# Altium PCB PCB1.PcbDoc
Units mil, origin at the board's own origin, x right, y up, seen from the top; angles counter-clockwise.
Board outline 3864.82 x 2365.71 mil, 2 copper layers (Top Layer, Bottom Layer); 47 components, 43 nets, 149 pads, 18 vias.
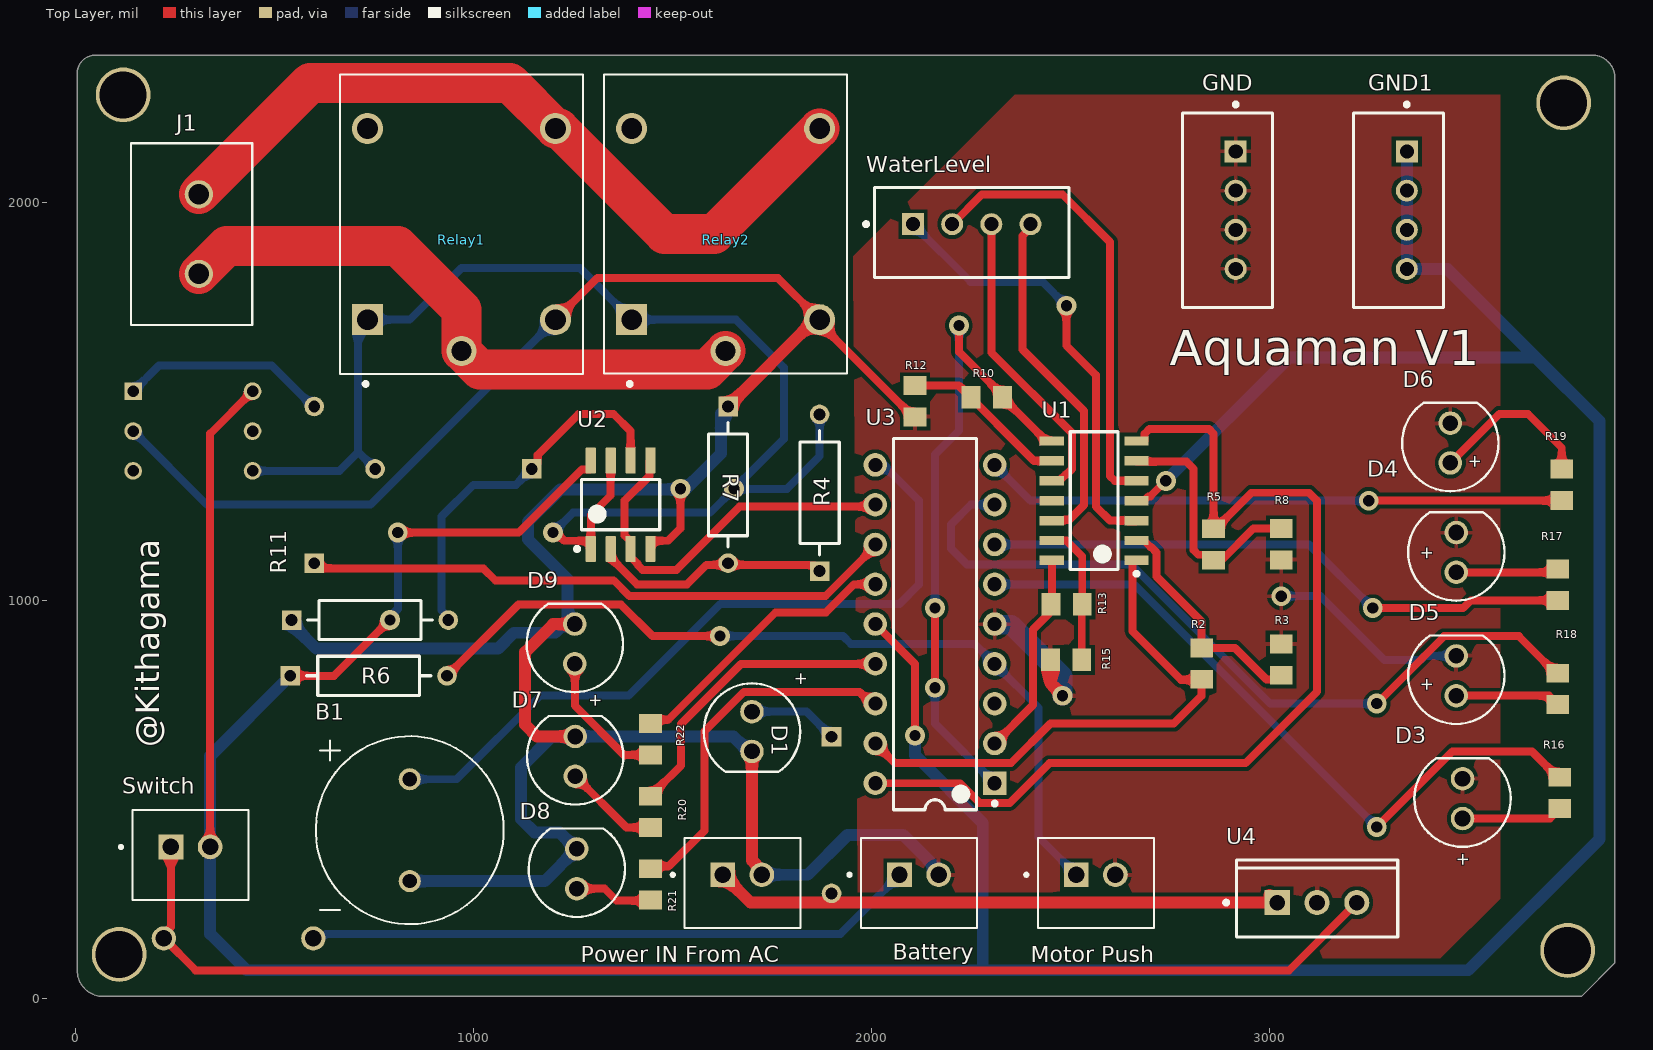
[diagram p0: Top Layer view]
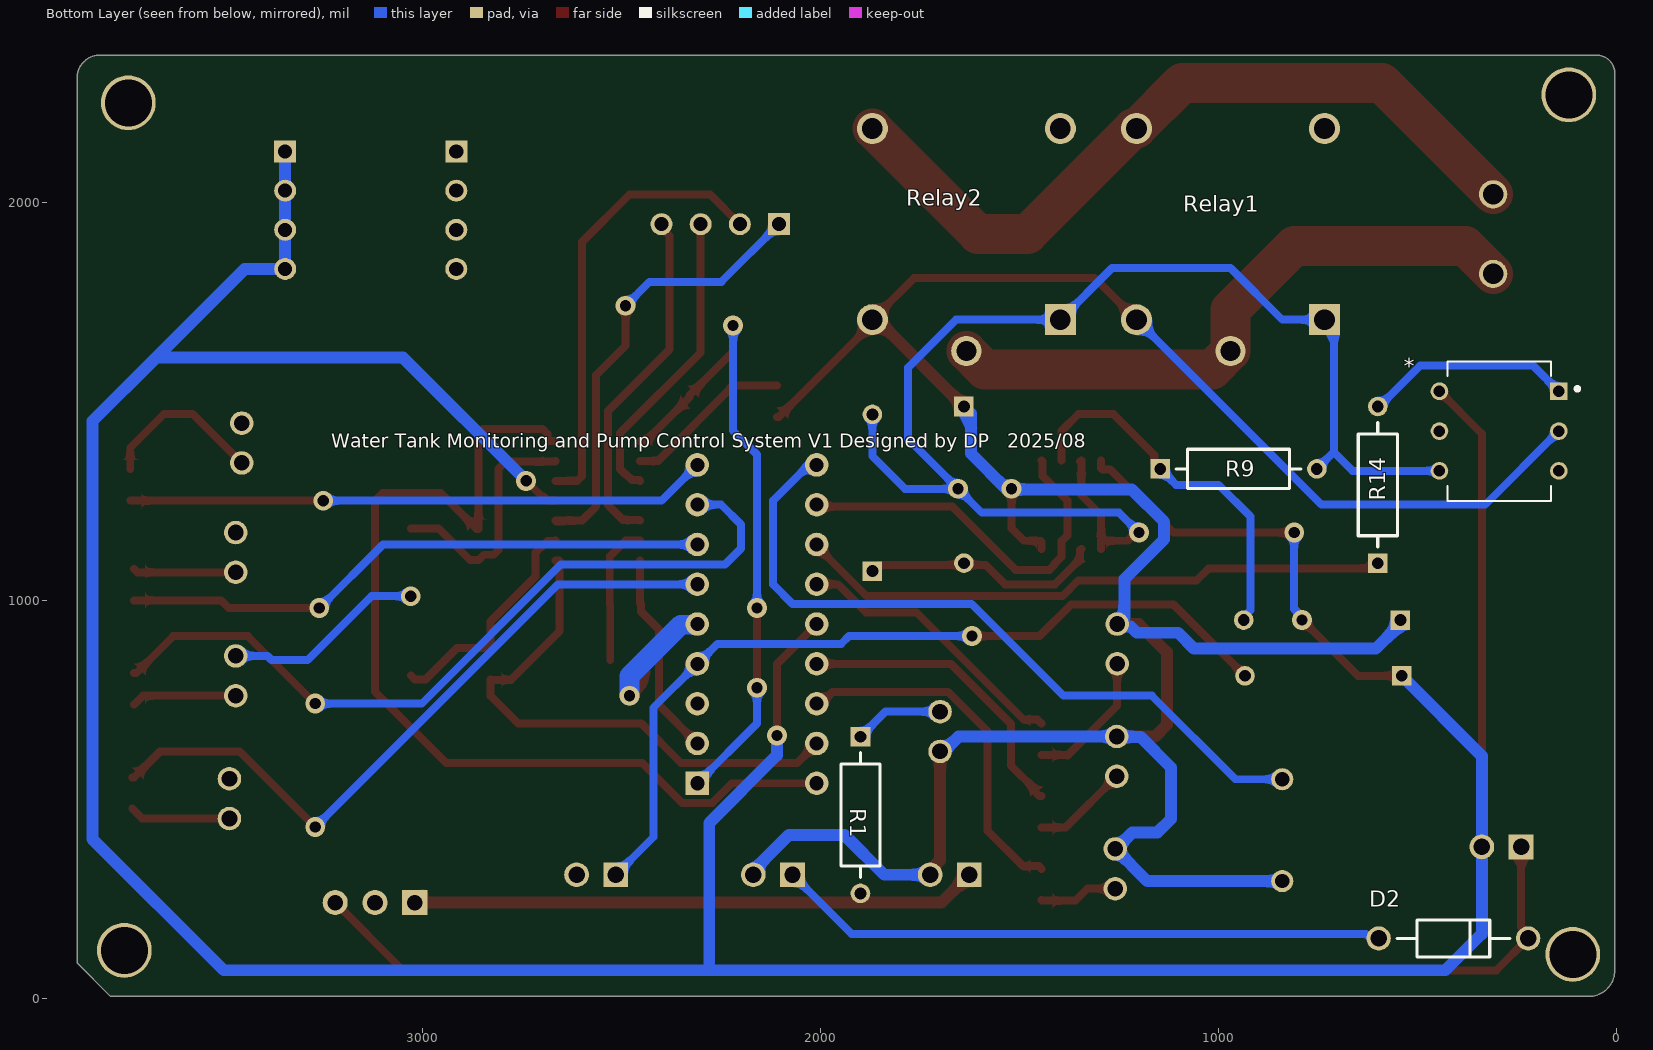
[diagram p1: Bottom Layer view, seen from below]
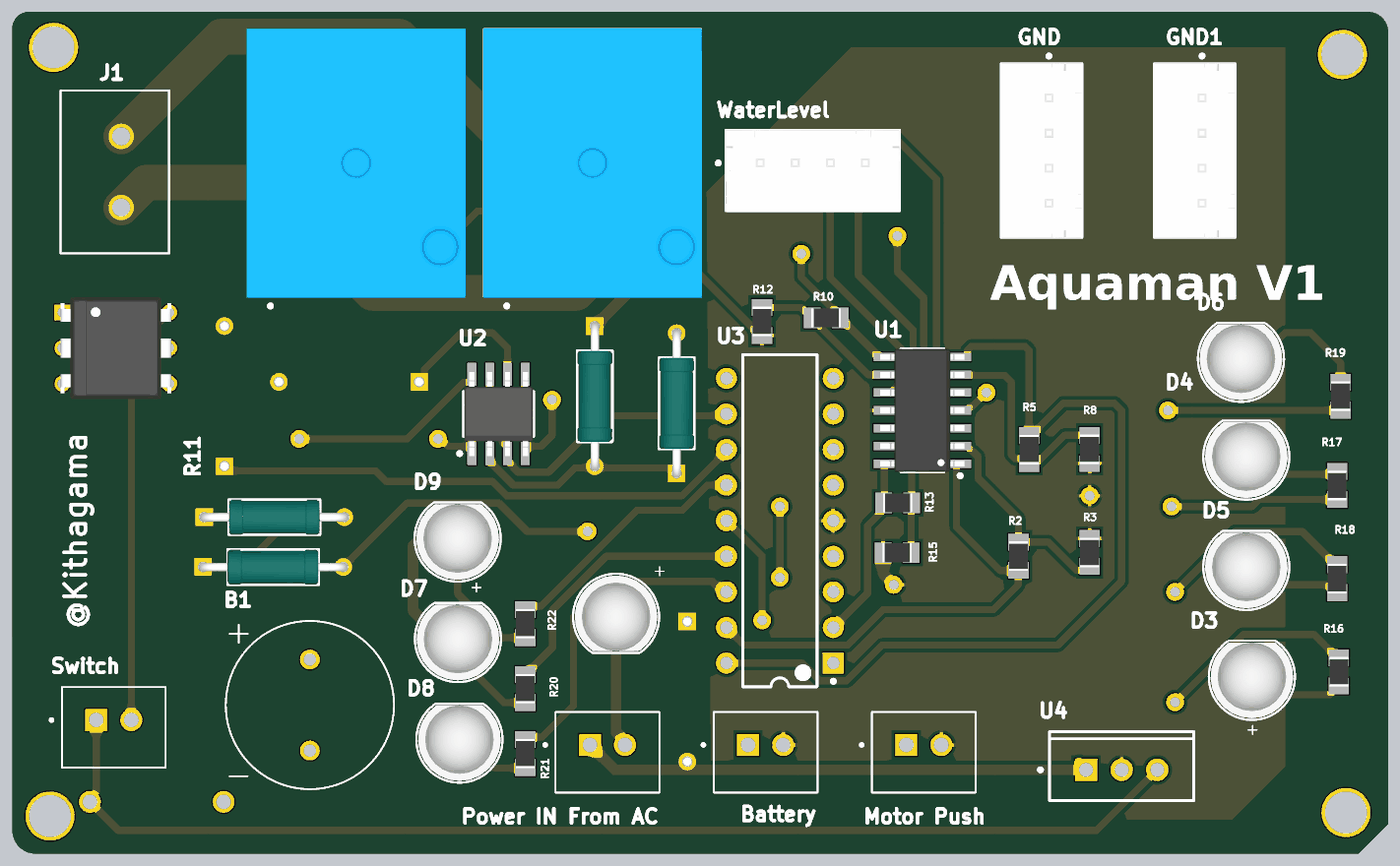
[diagram p2: 3D render of the assembled board from above, using the file's embedded part models]
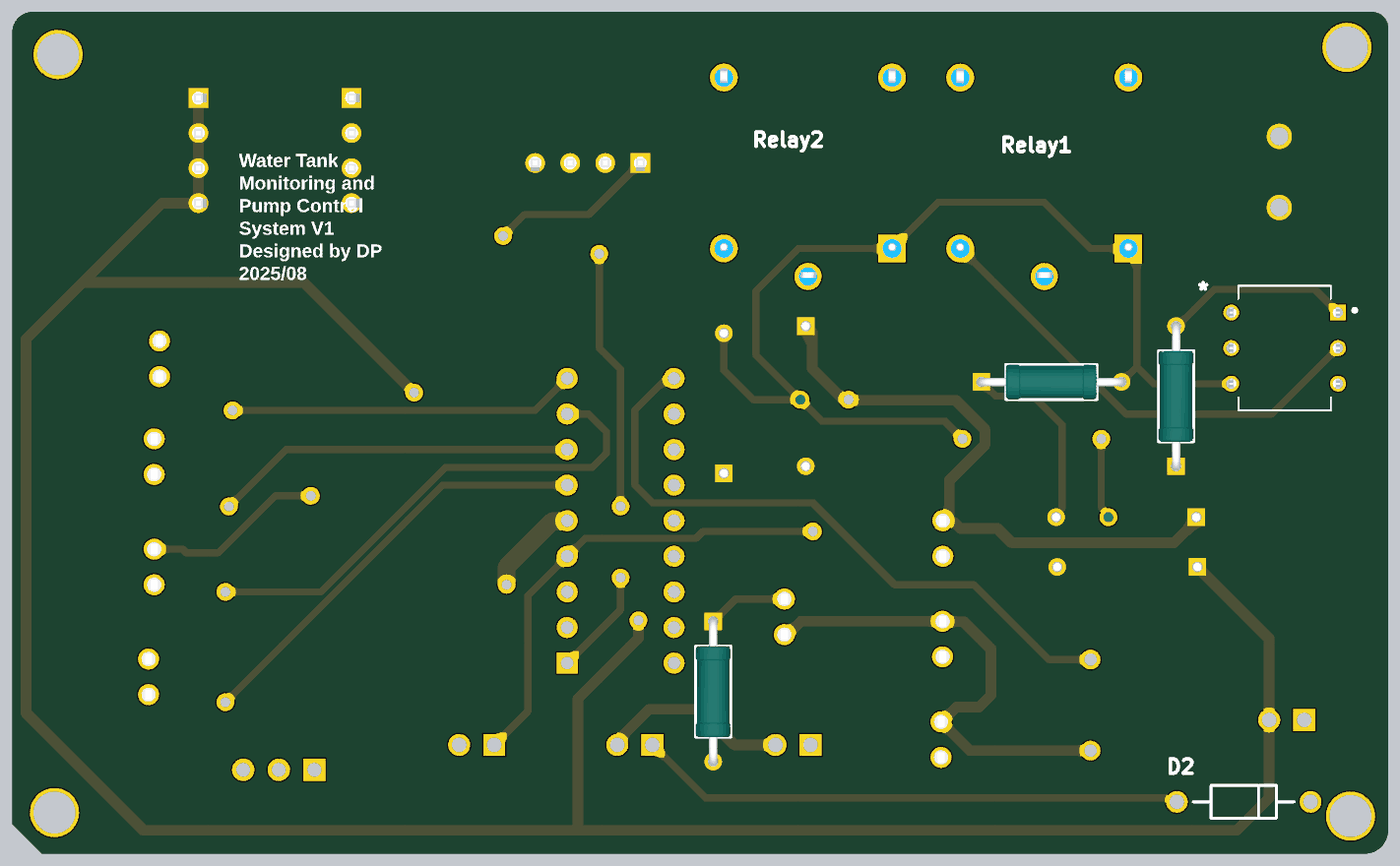
[diagram p3: 3D render of the assembled board from below, using the file's embedded part models]

## Layer stack, top to bottom
Top Solder: solder mask 0.4, Solder Resist, Dk 3.5
Top Layer: signal copper 1.4
Dielectric 1: dielectric 12.6, FR-4, Dk 4.8
Bottom Layer: signal copper 1.4
Bottom Solder: solder mask 0.4, Solder Resist, Dk 3.5

## Board outline
4.29,70 ccw(c70,70) 70,4.29 3754.32,4.32 3784.32,4.32 3868.74,88.74 3868.74,92.63 3868.75,2311.76 ccw(c3810.51,2311.76) 3810.51,2370 52.31,2369.97 50.74,2370 ccw(c50.74,2323.18) 3.92,2323.18

## Design rules (kind name [scope] priority, off if disabled: settings)
Clearance [All] p1: gap=10 ignorepadtopadclearanceinfootprint=FALSE
PolygonConnect [All] p1: connectstyle=Relief reliefconductorwidth=10 reliefentries=4 polygonreliefangle="90 Angle" airgapwidth=10
RoutingVias [All] p1: holewidth=28 width=50 viastyle="Through Hole" minholewidth=28 minwidth=50 maxholewidth=28 maxwidth=50
SolderMaskExpansion [All] p1: expansion=4 istentingtop=FALSE
SupplyNets "Schematic Supply Nets" [InNet('GND')] p1: voltage=0.000
Width [All] p1: maxlimit=100 minlimit=20 preferedwidth=20
30 further rules are at their usual default settings.

## Components (designator, comment, footprint, x,y, rotation, side; value= is the part's Value field where it differs from the comment)
* "MOC3021" MOC3021 31.89,1523.32 r180 bottom
B1 "Buzzer" Buzzer 840,422.05 r0 top
Battery "2PIN JST" "JST 2PIN" 2110,279.33 r180 top (schematic designator "Power From Battery")
D1 "151051BS04000" WL-TMRC_D5.9H8.7 1700,670 r270 top
D2 "1N4007" ONSC-AXIAL_LEAD-2-59-10_P 410,150 r0 bottom
D3 "151051BS04000" WL-TMRC_D5.9H8.7 3485.75,501.25 r90 top
D4 "151051BS04000" WL-TMRC_D5.9H8.7 3470.01,1119.99 r90 top
D5 "151051BS04000" WL-TMRC_D5.9H8.7 3470.01,809.99 r90 top
D6 "151051BS04000" WL-TMRC_D5.9H8.7 3455.01,1394.99 r90 top
D7 "151051BS04000" WL-TMRC_D5.9H8.7 1255.87,607.5 r90 top
D8 "151051BS04000" WL-TMRC_D5.9H8.7 1260.01,324.99 r90 top
D9 "151051BS04000" WL-TMRC_D5.9H8.7 1255,890 r90 top
GND "B4B-XH-A(LF)(SN)" FP-B4B-XH-A_LF_SN-MFG 2895,1980 r90 top
GND1 "B4B-XH-A(LF)(SN)" FP-B4B-XH-A_LF_SN-MFG 3325,1980 r90 top (schematic designator GND)
J1 "Screw connector" "Screw Connector" 270,1915 r90 top
"Motor Push" "2PIN JST" "JST 2PIN" 2554.21,279.33 r180 top
"Power IN From AC" "2PIN JST" "JST 2PIN" 1665.79,279.33 r180 top
R1 "MRS25000C1001FCT00" FP-MRS25-MFG 1900,460 r270 bottom
R2 "RC0805FR-071KL" RESC2013X60X35ML10T20 2830,840.63 r270 top
R3 "RC0805FR-071KL" RESC2013X60X35ML10T20 3030,850.63 r270 top
R4 "MRS25000C1001FCT00" FP-MRS25-MFG 1870,1270 r90 top
R5 "RC0805FR-071KL" RESC2013X60X35ML10T20 2860,1140 r90 top
R6 "MRS25000C1001FCT00" FP-MRS25-MFG 736.85,810 r0 top
R7 "MRS25000C1001FCT00" FP-MRS25-MFG 1640,1290 r270 top
R8 "RC0805FR-071KL" RESC2013X60X35ML10T20 3030,1140.63 r90 top
R9 "MRS25000C1001FCT00" FP-MRS25-MFG 950,1330 r180 bottom
R10 "RC0805FR-071KL" RESC2013X60X35ML10T20 2290,1510 r0 top
R11 "MRS25000C1001FCT00" FP-MRS25-MFG 740,950 r0 top
R12 "RC0805FR-071KL" RESC2013X60X35ML10T20 2110,1500 r90 top
R13 "RC0805FR-071KL" RESC2013X60X35ML10T20 2490.63,990 r180 top
R14 "MRS25000C1001FCT00" FP-MRS25-MFG 600,1290 r90 bottom
R15 "RC0805FR-071KL" RESC2013X60X35ML10T20 2489.37,850 r0 top
R16 "RC0805FR-071KL" RESC2013X60X35ML10T20 3730,515.63 r90 top
R17 "RC0805FR-071KL" RESC2013X60X35ML10T20 3725,1038.96 r270 top
R18 "RC0805FR-071KL" RESC2013X60X35ML10T20 3725,777.3 r90 top
R19 "RC0805FR-071KL" RESC2013X60X35ML10T20 3735,1290 r270 top
R20 "RC0805FR-071KL" RESC2013X60X35ML10T20 1445,468.13 r90 top
R21 "RC0805FR-071KL" RESC2013X60X35ML10T20 1445,285.63 r90 top
R22 "RC0805FR-071KL" RESC2013X60X35ML10T20 1445,650.63 r90 top
Relay1 "Relay" Relay 960,1910 r90 top
Relay2 "Relay" Relay 1623.78,1910.16 r90 top
Switch "2PIN JST" "JST 2PIN" 279.21,349.33 r180 top
U1 "LMV324IDR" D0014A_V 2560,1250 r180 top
U2 "LM358MX" D0008A_M 1370,1240 r90 top
U3 "PIC16F627A-I/P" PDIP300-P18 2160,940 r180 top
U4 "MC7805CTG" ONSC-TO-220-3-221AB-01 3120,240 r90 top
WaterLevel "B4B-XH-A(LF)(SN)" FP-B4B-XH-A_LF_SN-MFG 2252.36,1924.33 r180 top

## Footprints (in the part's own frame and the unit in brackets; to place one, negate y for a bottom-side part, rotate by r counter-clockwise, add the part's x,y. Pads: shape width x height; smd on the part's side, far side on the other; paste and mask are expansions set on the pad)
Buzzer [mm]
  round 1.408 hole 0.9: N(0,-3.25) P(0,3.25)
  silkscreen extent -6,-6 6,6
D0008A_M [mm] "SOIC, 8-Leads, Body 5x4mm, Pitch 1.27mm, IPC Low Density"
  rrect15% 1.65x0.65 smd: 1(-2.825,1.905) 2(-2.825,0.635) 3(-2.825,-0.635) 4(-2.825,-1.905) 5(2.825,-1.905) 6(2.825,-0.635) 7(2.825,0.635) 8(2.825,1.905)
  silkscreen extent -2.95,-2.5 1.6,2.9, body extent -3,-2.45 3,2.45, height 1.63
D0014A_V [mm] "SOIC, 14-Leads, Body 8.75x4mm, Pitch 1.27mm"
  rect 1.55x0.6 smd: 1(-2.7,3.81) 2(-2.7,2.54) 3(-2.7,1.27) 4(-2.7,0) 5(-2.7,-1.27) 6(-2.7,-2.54) 7(-2.7,-3.81) 8(2.7,-3.81) 9(2.7,-2.54) 10(2.7,-1.27) 11(2.7,0) 12(2.7,1.27) 13(2.7,2.54) 14(2.7,3.81)
  silkscreen extent -2.83,-4.4 1.53,4.78, body extent -3,-4.4 3,4.4, height 1.75
FP-B4B-XH-A_LF_SN-MFG [mm]
  rect 1.4x1.4 hole 0.9 paste-2539.97 mask+0: 1(3.75,-0.525)
  round 1.4 hole 0.9 paste-2539.97 mask+0: 2(1.25,-0.525) 3(-1.25,-0.525) 4(-3.75,-0.525)
  silkscreen extent -6.2,-2.88 6.87,2.88, body extent -6.3,-2.98 6.3,2.98, height 0.25
FP-MRS25-MFG [mm]
  rect 1.25x1.25 hole 0.75 paste-2539.97 mask+0: 1(-5,0)
  round 1.25 hole 0.75 paste-2539.97 mask+0: 2(5,0)
  silkscreen extent -3.98,-1.25 3.98,1.25, body extent -5.3,-1.25 5.3,1.25, height 2.5
"JST 2PIN" [mm]
  rect 1.575x1.575 / inner round 1.575 / far side rect 1.575x1.575 hole 1.05: 1(0.996,-0.779)
  round 1.575 hole 1.05: 2(-1.504,-0.779)
  silkscreen extent -3.95,-3.13 4.29,2.62
MOC3021 [mm]
  rect 1.13x1.13 / inner round 1.13 / far side rect 1.13x1.13 hole 0.73: 1(-2.873,0.043)
  round 1.13 hole 0.73: 2(-2.873,-2.497) 3(-2.873,-5.037) 4(-10.493,-5.037) 5(-10.493,-2.497) 6(-10.493,0.043)
  silkscreen extent -9.98,-6.95 -1.56,1.95, body extent -10.62,-6.15 -2.74,1.15, height 3.3
ONSC-AXIAL_LEAD-2-59-10_P [mm] "AXIAL, 2-Leads, Diameter 2.35mm"
  round 1.55 hole 1.05: 1(-4.77,0) 2(4.77,0)
  silkscreen extent -3.59,-1.17 3.59,1.17
ONSC-TO-220-3-221AB-01 [mm] "FM, 3-Leads, Body 10.3x4.85mm, Pitch 2.54mm"
  rect 1.6x1.6 hole 1: 1(0,2.54)
  round 1.6 hole 1: 2(0,0) 3(0,-2.54)
  silkscreen extent -2.18,-5.15 2.72,5.92, body extent -2.16,-5.15 2.69,5.15, height 19.68
PDIP300-P18 [mm] "DIP, 18-Pin, Row Spacing 7.62 mm, Pitch 2.54 mm"
  rect 1.5x1.5 hole 0.9: 1(-3.81,10.16)
  round 1.5 hole 0.9: 2(-3.81,7.62) 3(-3.81,5.08) 4(-3.81,2.54) 5(-3.81,0) 6(-3.81,-2.54) 7(-3.81,-5.08) 8(-3.81,-7.62) 9(-3.81,-10.16) 10(3.81,-10.16) 11(3.81,-7.62) 12(3.81,-5.08) 13(3.81,-2.54) 14(3.81,0) 15(3.81,2.54) 16(3.81,5.08) 17(3.81,7.62) 18(3.81,10.16)
  silkscreen extent -3.94,-11.85 2.65,11.85, body extent -3.6,-11.8 3.6,11.8, height 5.33
Relay [mm]
  rect 1.98x1.98 / inner round 1.98 / far side rect 1.98x1.98 hole 1.32: A1(-5.211,5.746)
  round 1.98 hole 1.32: A2(-5.211,-6.254) NC(6.989,5.746) NO(6.989,-6.254)
  round 1.935 hole 1.29: COM(-7.211,-0.254)
  silkscreen extent -9.41,-8 10.44,7.5, body extent -8.71,-8.05 10.49,7.55, height 15.8
RESC2013X60X35ML10T20 [mm] "Chip Resistor, 2-Leads, Body 2.1x1.35mm, IPC Low Density"
  rect 1.2x1.45 smd: 1(-1,0) 2(1,0)
  body extent -1.05,-0.68 1.05,0.67, height 0.6
"Screw Connector" [mil]
  round 71 / inner round 60 / far side round 71 hole 51 paste-99999 mask+0: 1(-95,-40) 2(105,-40)
  silkscreen extent -224,-175 234,130
WL-TMRC_D5.9H8.7 [mm] "THT Mono-color Round Color LED, 2-leads"
  round 1.5 hole 1: 1(-1.27,0) 2(1.27,0)
  silkscreen extent -3.07,-3.07 2.58,3.08, body extent -2.95,-2.95 2.45,2.95, height 9.2

## Part data
D1 D3 D4 D5 D6 D7 D8 D9: library part CMP-1488-00009-2, Case/Package=Radial, Color=Blue, Forward Current=100mA, Forward Voltage=3.2V, Max Operating Temperature=85°C, Max Reverse Voltage (DC)=5V, Min Operating Temperature=-40°C, Test Current=20mA, Dominant Wavelength=470nm, Height=8.6mm, Length=5mm, Lens Size=5mm, Lens Style="Circular, Diffused, Round", Luminous Intensity=500mcd, Mount="Through Hole", NexarPartId=29717812, Packaging=Bulk, Peak Wavelength=465nm, REACH SVHC=Unknown, RoHS=Compliant, Viewing Angle=40°, Wavelength=470nm, Width=5mm
D2: library part CMP-0902-00142-1, "Standard Recovery Rectifier, 2-Pin Axial_Lead, Pb-Free, Bulk Bag", Manufacturer="On Semiconductor", ComponentLink1Description="Manufacturer URL", ComponentLink1URL=http://www.onsemi.com/, ComponentLink2Description=Datasheet, ComponentLink2URL=http://www.onsemi.com/pub_link/Collateral/1N4001-D.PDF, ComponentLink3Description="Package Specification", ComponentLink3URL=http://www.onsemi.cn/pub_link/Collateral/59-10.PDF, DatasheetVersion="Rev. 13", IFSM Max (A)=30, IO(rec) Max (A)=1, Mounting Technology="Through Hole", PackageDescription="2-Pin, Axial Lead, Diameter 2.35 mm", PackageReference=AXIAL_LEAD-2-59-10, PackageVersion="Rev. U, 02/2005", Packing="Bulk Bag", PartNumber=1N4007, RoHS=TRUE, Type="Standard Recovery", VRRM Max (V)=1000
GND GND1 WaterLevel: library part CMP-17439-000250-1, "CONN HEADER VERT 4POS 2.5MM", Color=Natural, Contact Resistance=20mR, Current Rating=3A, Flammability Rating="UL94 V-0", Housing Color=White, Insulation Resistance=1GR, Max Operating Temperature=85°C, Max Voltage Rating (AC)=250V, Min Operating Temperature=-25°C, Package Quantity=500, Connector Type=Header, Contact Finish - Mating=TIN, Contact Material=Brass, Contact Plating=Tin, Contact Shape=Square, Contact Type="Male Pin", Depth=5.75mm, Fastening Type=Detent, Gender=Male, Housing Material=Polyamide, Insulation Color=Natural, Insulation Material=Nylon, Lead Free="Lead Free", Lead Pitch=2.5mm, Length=12.4mm, Mated Stacking Heights=9.8mm, Material=Polyamide, Max Current Rating=3A, Max Voltage Rating (DC)=250V, Mount="Through Hole", Number of Contacts=4, Number of Positions=4, Number of Rows=1, Orientation=Straight, Packaging=Bulk, Pitch=2.5mm, REACH SVHC="No SVHC", Series=XH, Termination=Solder, Voltage Rating=250V, Voltage Rating (AC)=250V, Wire/Cable Gauge=22AWG
R1 R4 R7 R9 R11 R14: library part CMP-02408-000051-1, "RES 1K OHM 0.6W 1% AXIAL", Case/Package=Axial, Max Operating Temperature=155°C, Max Power Dissipation=600mW, Min Operating Temperature=-55°C, Package Quantity=5000, Resistance=1kR, Resistance Tolerance=1%, Resistor Type="Metal Film", Temperature Coefficient=50ppm/°C, Voltage Rating=350V, Construction=Cylindrical, Contact Plating=Tin, Diameter=2.5mm, Lead Diameter=0.6mm, Lead Free="Lead Free", Length=6.5mm, Military Standard=Not, Mount="Through Hole", Number of Pins=2, Number of Terminations=2, Packaging="Tape and Reel", Power Rating=600mW, Radiation Hardening=No, RoHS Compliant=Yes, Series=MRS25, Technology="THIN FILM", Termination=Axial, Tolerance=1%, Voltage Rating (DC)=350V, Weight=0.00776oz, Width=2.5mm
R2 R3 R5 R8 R10 R12 R13 R15 R16 R17 R18 R19 R20 R21 R22: library part CMP-2100-03671-1, "Chip Resistor, 1 KOhm, +/- 1%, 125 mW, -55 to 155 degC, 0805 (2012 Metric), RoHS, Tape and Reel", Case Code (Imperial)=0805, Case Code (Metric)=2012, Manufacturer=Yageo, Max Operating Temperature=155degC, Max Power Dissipation=125mW, Min Operating Temperature=-55degC, Package Description="2-Pin Surface Mounted Device, Body 2 x 1.25 mm", Package Quantity=1, Resistance=1KOhm, Temperature Coefficient=100ppm/degreesC, Tolerance=1%, Voltage Rating=150V, Case/Package=0805, Composition=ThickFilm, Datasheet URL=http://www.yageo.com/NewPortal/yageodocoutput?fileName=/pdf/R-Chip/PYu-RC_Group_51_RoHS_L_5.pdf, Datasheet Version="Rev. 5, 10/2016", Depth=1.25mm, Height=0.024inch, Lead Free=LeadFree, Length=0.079inch, Manufacturer URL=http://www.yageo.com/, Military Standard=Not, Number of Pins=2, Number of Terminations=2, Package Reference=0805, Packaging=TapeandReel, Power Rating=125mW, REACH SVHC=Unknown, RoHSCompliant=true, Termination=SMD/SMT, Voltage Rating (DC)=150V, Width=0.049inch
R6: library part CMP-02408-000051-1, "100K", Case/Package=Axial, Max Operating Temperature=155°C, Max Power Dissipation=600mW, Min Operating Temperature=-55°C, Package Quantity=5000, Resistance=1kR, Resistance Tolerance=1%, Resistor Type="Metal Film", Temperature Coefficient=50ppm/°C, Voltage Rating=350V, Construction=Cylindrical, Contact Plating=Tin, Diameter=2.5mm, Lead Diameter=0.6mm, Lead Free="Lead Free", Length=6.5mm, Military Standard=Not, Mount="Through Hole", Number of Pins=2, Number of Terminations=2, Packaging="Tape and Reel", Power Rating=600mW, Radiation Hardening=No, RoHS Compliant=Yes, Series=MRS25, Technology="THIN FILM", Termination=Axial, Tolerance=1%, Voltage Rating (DC)=350V, Weight=0.00776oz, Width=2.5mm
U1: library part CMP-1685-00010-1, "Quad Low-Voltage Rail-to-Rail Output Operational Amplifier, 2.7 to 5.5 V, -40 to 125 degC, 14-Pin SOIC (D), Green (RoHS & no Sb/Br), Tape and Reel", Code_JEDEC=MS-012, ComponentLink1Description="Manufacturer URL", ComponentLink1URL=http://www.ti.com/, ComponentLink2Description=Datasheet, ComponentLink2URL=http://www.ti.com/lit/ds/symlink/lmv324.pdf, ComponentLink3Description="Package Specification", ComponentLink3URL=http://www.ti.com/lit/ml/mpds177g/mpds177g.pdf, DatasheetVersion="SLOS263W, 10/2014", PackageDescription="14-Pin Small Outline Integrated Circuit, Body 8.65 x 3.9 mm, Pitch 1.27 mm", PackageReference=D0014A
U2: library part CMP-0055-00630-3, "Low Power Dual Operational Amplifier, 8-pin Narrow SOIC", Manufacturer="Texas Instruments", Package Reference=D0008A, PackageTopMarking=NSZXTT*LM*358M, PowerWise=N, Code_IPC=SOIC127P600-8, Code_JEDEC=MS-012-AA, ComponentLink1Description="Datasheet URL", ComponentLink1URL=http://www.ti.com/general/docs/lit/getliterature.tsp?genericPartNumber=LM358-N&fileType=pdf, CompType=Amplifiers, PackageDescription="SOIC Narrow, 4.9 x 3.9 x 1.45mm, 8 Lead, 1.27mm Pitch", PinCount=8, RoHS=N
U3: library part CMP-0115-00194-1, "FLASH-Based 8-Bit CMOS Microcontroller with nanoWatt Technology, 1K (x14-Bit words) FLASH, 224 Bytes SRAM, 18-Pin PDIP, 3.0 to 5.5V Supply Range, Industrial Temperature", Code_JEDEC=MS-001, DatasheetVersion="revF, Mar-2007", PackageDescription="18-Lead Plastic Dual In-Line (P) - 300 mil Body [PDIP]", PackageReference=PDIP300-P18, PackageVersion="revBB, Aug-2009"
U4: library part CMP-2000-04928-1, "Positive Voltage Regulator, 1 A, 5 V, 0 to 125 degC, 3-Pin TO-220, RoHS, Tube", Current, Output, Maximum=1A, Current, Quiescent Supply=6.5mA, Current, Supply=3.2mA, Dropout Voltage=2V, Manufacturer="ON Semiconductor", Package Description="3-Pin Flange Mount, Vertical Straight Lead, Body 9.97 x 4.445 mm, Pitch 2.54 mm", Package Reference=TO-220-3-221AB-01, Package Type=TO-220, Package Version="Rev. A, 11/2010", Resistance, Thermal, Junction to Case=5degC/W, Temperature, Operating, Maximum=+125degC, Temperature, Operating, Minimum=0degC, Temperature, Operating, Range=0to+125degC, Voltage, Input Range=Maximumof35V, Voltage, Input, High Level=35V, Voltage, Noise=10μV/V, Voltage, Output=5V, Datasheet URL=http://www.onsemi.com/pub_link/Collateral/MC7800-D.PDF, Datasheet Version="Rev. 27, 11/2014", Dimensions=10.28x4.82x15.75mm, Dropout Voltage Measurement Current=1A, Height=15.75mm, Length=10.28mm, Line Regulation=20mV, Load Regulation=25mV, Manufacturer URL=http://www.onsemi.com/, Mounting Type=ThroughHole, Number of Outputs=1, Number of Pins=3, Output Type=Fixed, Polarity=Positive, Regulation, Line=0.5mV, Regulation, Load=1.3mV, Regulator Function=Standard, Regulator Type=PositiveVoltageOut, Type=VoltageRegulator, Voltage, Dropout=2V, Voltage, Supply=35V, Width=4.82mm

## Free pads (board coordinates)
  round 137.8 hole 118.11: 1(3740,2250) 2(120,2270) 3(110,110) 4(3750,120)

## Via types
v1: diameter 50, hole 28, Top Layer to Bottom Layer, 18 vias

## Nets (pads, with @x,y where several pads share a name; then routed paths per layer and width w, separated by ;. In a path a pad name is that pad's centre, name@x,y a point inside that pad or via, vN(x,y) a via of type N, cw(c..) or ccw(c..) an arc to the next point about the centre after c; other vN are vias at no path point)
A0: R2.2 U1.1 U3.17 | length 1363.7
  Top Layer w20: U3.17 2059.53,590.47 2350.47,590.47 2450,690 2760,690 2829.35,759.35 2829.35,800.61 R2.2 2828.74,800 2778.23,800 2656.3,921.93 2656.3,1098.19 2658.11,1100 U1.1
A1: R5.2 U1.7 U3.18 | length 2491.7
  Top Layer w20: U3.18 2222.66,540 2272.19,490.47 2347.81,490.47 2447.81,590.47 2940.47,590.47 3120,770 3120,1250 3100,1270 2955.55,1270 2864.92,1179.37 R5.2 2860,1418.28 2848.28,1430 2698.53,1430 2686.81,1418.28 2686.81,1401.81 2685,1400 U1.7
A2: R10.2 U1.8 U3.1 | length 1622.2
  Top Layer w20: v1(2160,780) v1(2160,980) ; v1(2220,1690) 2220,1624.29 2329.37,1514.92 R10.2 2439.37,1400 U1.8
  Bottom Layer w20: v1@2160,770 2160,690 U3.1 ; v1(2160,980) 2160,1365.94 2220,1425.94 v1(2220,1690)
A3: R13.2 U1.14 U3.2 | length 519.5
  Top Layer w20: U3.2 2406.38,736.38 2406.38,926.38 2451.26,971.26 R13.2 2453.7,992.44 U1.14
A4: U3.3
A5: "Motor Push.1" R6.2 U3.4 | length 2131.2
  Top Layer w20: R6.2@931.1,807.4 1113.23,989.53 1370.47,989.53 1450,910 v1(1620,910)
  Bottom Layer w20: v1(1620,910) 1928.77,910 1948.3,890.47 2259.53,890.47 U3.4 2420.47,729.53 2420.47,404.53 2515,310
A6: R20.2 U3.15 | length 767.2
  Top Layer w20: R20.2 1449.92,507.5 1463.54,521.12 1463.54,526.04 1521.54,584.04 1521.54,689.11 1672.43,840 U3.15
A7: R21.2 U3.16 | length 907.8
  Top Layer w20: R21.2 1451.83,331.83 1491.83,331.83 1580.66,420.66 1580.66,670.69 1679.49,769.52 1969.91,769.52 1999.43,740 U3.16
B0: R16.2 U3.6 | length 1778.3
  Top Layer w20: v1(3270,430) 3460,620 3660.08,620 3725.08,555 R16.2
  Bottom Layer w20: U3.6 2660,1040 v1(3270,430)
B1: R17.2 U3.7 | length 1489.4
  Top Layer w20: v1(3260,980) 3487.17,980 3506.76,999.59 R17.2
  Bottom Layer w20: U3.7 3100,1140 v1(3260,980)
B2: R18.2 U3.8 | length 1985.9
  Top Layer w20: v1(3270,740) 3439.53,909.53 3627.22,909.53 3720.08,816.67 R18.2
  Bottom Layer w20: U3.8 2250,1240 2200,1190 2200,1130 2240.47,1089.53 2652.9,1089.53 3002.43,740 v1(3270,740)
B3: R19.2 U3.9 | length 1462.5
  Top Layer w20: v1(3250,1250) 3250.31,1250.31 3734.69,1250.31 R19.2
  Bottom Layer w20: U3.9 2400,1250 v1(3250,1250)
B4: B1.P U3.10 | length 1840.2
  Bottom Layer w20: B1.P 957.77,550 1167.77,760 1390,760 1620.47,990.47 2070.47,990.47 2120,1040 2120,1250 2037.47,1332.53 2017.47,1332.53 U3.10
B5: U2.3 U2.5 U3.11 | length 973.6
  Top Layer w20: U2.5 1442.2,1348.43 1442.2,1312.2 1380,1250 1380,1162.98 1391.72,1151.26 1392.2,1151.26 1395,1148.46 1395,1109.09 1411.94,1092.16 1411.94,1089.41 1425.04,1076.3 1510.07,1076.3 1668.77,1235 2005,1235 U3.11
B6: R14.1 U3.12 | length 1500.8
  Top Layer w20: R14.1 613.15,1080 1025,1080 1055,1050 1352.43,1050 1392.43,1010 1884.35,1010 2010,1135.65 U3.12
B7: R22.2 U3.13 | length 710
  Top Layer w20: R22.2 1454.8,699.8 1489.8,699.8 1759.53,969.53 1886.3,969.53 1956.77,1040 U3.13
GND: "Motor Push.2" "Power IN From AC.2" *.2 B1.N Battery.2 D1.2 D3.2 D4.2 D5.2 D6.2 D7.2 D8.2 D9.2 GND.1 GND.2 GND.3 GND.4 R3.1 R7.1 R8.1 R11.1 R12.1 R15.1 Relay1.A2 Relay2.A2 U1.11 U2.4 U3.5 U4.2 | length 8267.3
  Top Layer w20: Relay1.A2 1311.38,1810 1765,1810 Relay2.A2@1864.07,1710.93 ; U2.4 1445,1146.55 1447.8,1149.34 1489.34,1149.34 1520,1180 v1(1520,1280) ; Relay2.A2 1870,1695.71 2105.08,1460.63 R12.1
  Top Layer w30: D9.2 1200.36,940.01 1130,869.64 1130,687.06 1159.56,657.5 D7.2 ; R7.1 Relay2.A2@1858.15,1705 ; D1.2 1700.01,346.36 1725,321.37 1725,310 ; R15.1 2450,791.46 2480,761.46 v1(2480,760)
  Bottom Layer w20: *.2 330,1240 741.38,1240 Relay1.A2 ; v1(3030,1010) 3129.06,1010 3289.06,850 3380,850 3390,860 D5.2
  Bottom Layer w30: R11.1 552.76,940.39 552.76,930.5 605.02,878.24 1061.88,878.24 1101.88,918.24 1205.63,918.24 1221.84,934.45 1249.43,934.45 D9.2 ; B1.N 1179.09,294.09 D8.2 1258.29,375 1217.05,416.24 1153.76,416.24 1120,450 1120,580 1196.33,656.33 1254.69,656.33 D7.2 1653.33,657.5 1690.84,619.99 D1.2 ; D9.2@1236.87,958.13 1236.87,1053.13 1136.88,1153.12 1136.88,1196.88 1218.24,1278.24 1531.88,1278.24 1621.88,1368.24 1621.88,1468.73 R7.1 ; 1725,310 1840,310 1940,410 2080,410 2169.21,320.79 Battery.2
  Bottom Layer w50: U3.5 2311.73,938.27 2351.73,938.27 2480,810 v1(2480,760)
LiveIn: J1.1 Relay1.COM Relay2.COM | length 1561.2
  Top Layer w100: J1.1 380,1890 810,1890 970,1730 Relay1.COM 1016.1,1580 1587.52,1580 Relay2.COM
LiveOut: J1.2 Relay1.NO Relay2.NO | length 1934.7
  Top Layer w100: J1.2 590,2300 1091.38,2300 Relay1.NO ; Relay1.NO@1214.84,2185.16 1480,1920 1604.69,1920 Relay2.NO
Net*_1: *.1 R14.2 | length 524.6
  Bottom Layer w20: *.1 210,1590 493.28,1590 596.43,1486.85 R14.2
Net*_4: *.4 R4.2 R9.2 Relay1.A1 Relay2.A1 U2.1 U2.7 | length 3469.4
  Top Layer w20: v1(1200,1170) 1208.12,1170 1228.78,1149.34 1292.2,1149.34 1295,1146.55 U2.1 U2.1@1295,1147.2 ; U2.1@1295,1150 1295,1213.6 1345,1263.6 U2.7 U2.7@1347.8,1348.43
  Bottom Layer w20: *.4 663.15,1325 710,1371.85 710,1380 710,1681.06 Relay1.A1 839.84,1704.84 970,1835 1267.56,1835 Relay2.A1 1660,1705 1780,1585 1780,1405 v1(1655,1280) ; 710.07,1371.92 711.23,1371.92 R9.2 ; v1(1200,1170) 1250,1220 1595,1220 v1(1655,1280) ; R4.2 1870,1361.85 1788.15,1280 v1(1655,1280)
NetD1_1: D1.1 R1.1 | length 226.1
  Bottom Layer w20: D1.1 1836.86,719.99 R1.1
NetD2_1: D2.1 Switch.1 U4.3 | length 3338.7
  Top Layer w20: Switch.1 240,178.9 222.2,161.1 D2.1 302.2,70 3050,70 U4.3
NetD2_2: Battery.1 D2.2 | length 1539.3
  Bottom Layer w20: D2.2 605.64,157.85 626.49,157.85 630.02,161.38 1922.17,161.38 Battery.1
NetD3_1: D3.1 R16.1 | length 254.6
  Top Layer w20: D3.1 3705,451.26 R16.1
NetD4_1: D4.1 R17.1 | length 258.5
  Top Layer w20: D4.1 3716.67,1070 R17.1
NetD5_1: D5.1 R18.1 | length 264.1
  Top Layer w20: D5.1 3702.93,760 R18.1
NetD6_1: D6.1 R19.1 | length 420
  Top Layer w20: D6.1 3578.3,1468.3 3649.69,1468.3 3735,1382.99 R19.1
NetD7_1: D7.1 R20.1 | length 242.5
  Top Layer w20: D7.1 1384.6,428.76 R20.1
NetD8_1: D8.1 R21.1 | length 197.9
  Top Layer w20: D8.1 1330,275 1360,245 1443.74,245 R21.1
NetD9_1: D9.1 R22.1 | length 347.3
  Top Layer w20: D9.1 1254.99,735.01 1380,610 1381.26,611.26 R22.1
NetR2_1: R2.1 R3.2 U1.2 | length 587.2
  Top Layer w20: U1.2 2668.11,1148.19 2686.81,1148.19 2700.95,1134.05 2702.86,1134.05 2716.81,1120.1 2716.81,1097.1 2716.81,1059.5 2830,946.31 R2.1 2913.66,880 2993.03,800.63 3019.37,800.63 R3.2
NetR4_1: R4.1 R7.2 U2.2 | length 605.2
  Top Layer w20: U2.2 1347.8,1125.98 1347.8,1103.55 1411.34,1040 1536.85,1040 1585.39,1088.54 1635.39,1088.54 R7.2 1644.61,1088.54 1843.68,1088.54 1844.47,1087.76 1855.39,1087.76 R4.1
NetR5_1: R5.1 R8.2 U1.6 | length 619.4
  Top Layer w20: U1.6 2668.11,1348.19 2791.81,1348.19 2810,1330 2810,1125.97 2821.72,1114.25 2846.38,1114.25 R5.1 2880.63,1100.63 2960,1180 R8.2
NetR9_1: R9.1 R11.2 U2.6 | length 951.7
  Top Layer w20: R9.1 1161.46,1344.61 1161.46,1364.61 1264.35,1467.5 1352.5,1467.5 1395,1425 U2.6
  Bottom Layer w20: R11.2 936.85,957.9 920,974.76 920,1210 1000,1290 1106.85,1290 R9.1
NetR10_1: R10.1 R12.2 U1.9 | length 422.1
  Top Layer w20: R12.2 2219.55,1539.37 2408.92,1350 U1.9
NetR13_1: R13.1 R15.2 U1.13 | length 353.4
  Top Layer w20: U1.13 2490,1150 2530,1110 R13.1 2528.74,988.74 R15.2
POW: "Power IN From AC.1" R1.2 U4.1 | length 1449.3
  Top Layer w30: 1626.57,310 1696.57,240 U4.1 U4.1@3001,259
Vcc: *.6 GND1.1 GND1.2 GND1.3 GND1.4 R6.1 Switch.2 U1.4 U2.8 U3.14 | length 10817.8
  Top Layer w20: Switch.2 338.43,1418.43 *.6 ; R6.1 650,810 v1(790,950) ; v1(810,1170) 1113.78,1170 1272.52,1328.74 1292.2,1328.74 1295,1331.54 U2.8 ; U3.14 2110,840 v1(2110,660) ; U1.4 2685,1250 2696.11,1261.11 2701.11,1261.11 v1(2740,1300)
  Bottom Layer w20: v1(790,950) 790,958.12 810,978.12 v1(810,1170)
  Bottom Layer w30: R6.1 338.43,608.43 Switch.2 338.43,161.57 430,70 2280,70 ; v1(2110,660) 2110,610 2280,440 2280,70 ; v1(2740,1300) 3050,1610 3670,1610 ; GND1.1 GND1.2 GND1.3 GND1.4 3447.64,1832.36 3670,1610 ; 2280,70 3500,70 3830,400 3830,1450 3670,1610
Wl1: U1.3 WaterLevel.1 | length 1143.3
  Top Layer w20: v1(2490,1740) 2490,1640 2564.21,1565.79 2564.21,1235.79 2600,1200 U1.3 2664.49,1198.19 U1.3@2645.79,1198.19
  Bottom Layer w20: WaterLevel.1 2249.72,1800 2430,1800 v1(2490,1740)
Wl2: U1.5 WaterLevel.2 | length 1137.1
  Top Layer w20: WaterLevel.2 2278.15,2020 2480,2020 2600,1900 2600,1311.72 2611.72,1300 U1.5
Wl3: U1.10 WaterLevel.3 | length 761.9
  Top Layer w20: WaterLevel.3 2301.57,1622.73 2504.21,1420.09 2504.21,1329.9 2490.26,1315.95 2488.35,1315.95 2474.21,1301.81 2455.51,1301.81 U1.10
Wl4: U1.12 WaterLevel.4 | length 874.6
  Top Layer w20: WaterLevel.4 2400,1935.73 2380,1915.73 2380,1630 2534.21,1475.79 2534.21,1239.46 2496.57,1201.81 2455.51,1201.81 U1.12
pads on no net: *.3 *.5 Relay1.NC Relay2.NC

## Polygon pours and split planes (outlines as drawn)
GND on Top Layer "GND_L01_P000" (solid, remove dead copper, pour order 0): 1954.22,1864.22 2360,2270 3580,2270 3580,250 3430,100 1967.39,100

## Silkscreen, mask and mechanical layers (free items; w line width, h text height)
Top Overlay:
  text "Aquaman V1" at 2750,1560.96 h150
  text "@Kithagama" at 210.01,630 h60 r90
Bottom Overlay:
  text "Water Tank Monitoring and Pump Control System V1 Designed by DP   2025/08" at 3230,1370 h60
Mechanical 1:
  lines w10: 3.92,2323.18 cw(c50.74,2323.18) 50.74,2370 ; 3.93,2323.18 4.29,70 ccw(c70,70) 70,4.29 3754.32,4.32 3784.32,4.32 3868.74,88.74 3868.74,92.63 3868.75,2311.76 ccw(c3810.51,2311.76) 3810.51,2370 52.31,2369.97

## Text inside footprints (layer, text, board x,y; h text height)
D1: Top Overlay "+" at 1810,820 h31.5 r270
D3: Top Overlay "+" at 3500,330 h31.5 r90
D4: Top Overlay "+" at 3410,1100 h31.5 r90
D5: Top Overlay "+" at 3410,770 h31.5 r90
D6: Top Overlay "+" at 3530,1330 h31.5 r90
D9: Top Overlay "+" at 1320,730 h31.5 r90